# EAGLE board lvc (EAGLE 7.6.0)
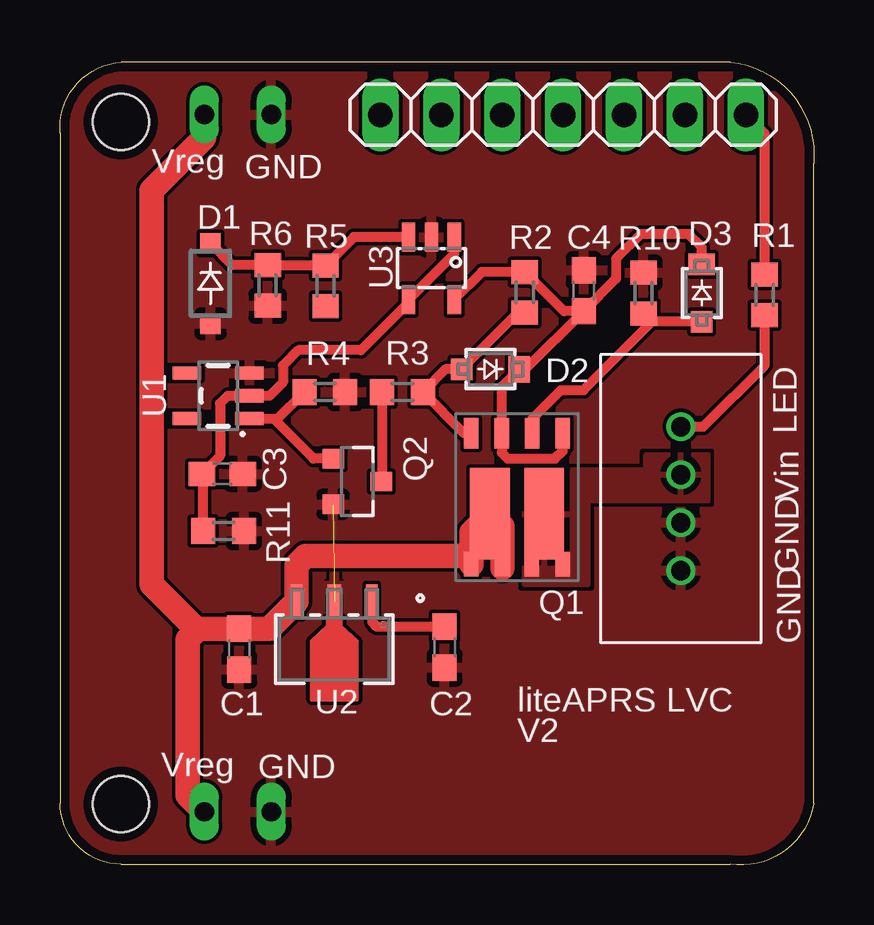
[diagram p0: board, top side]
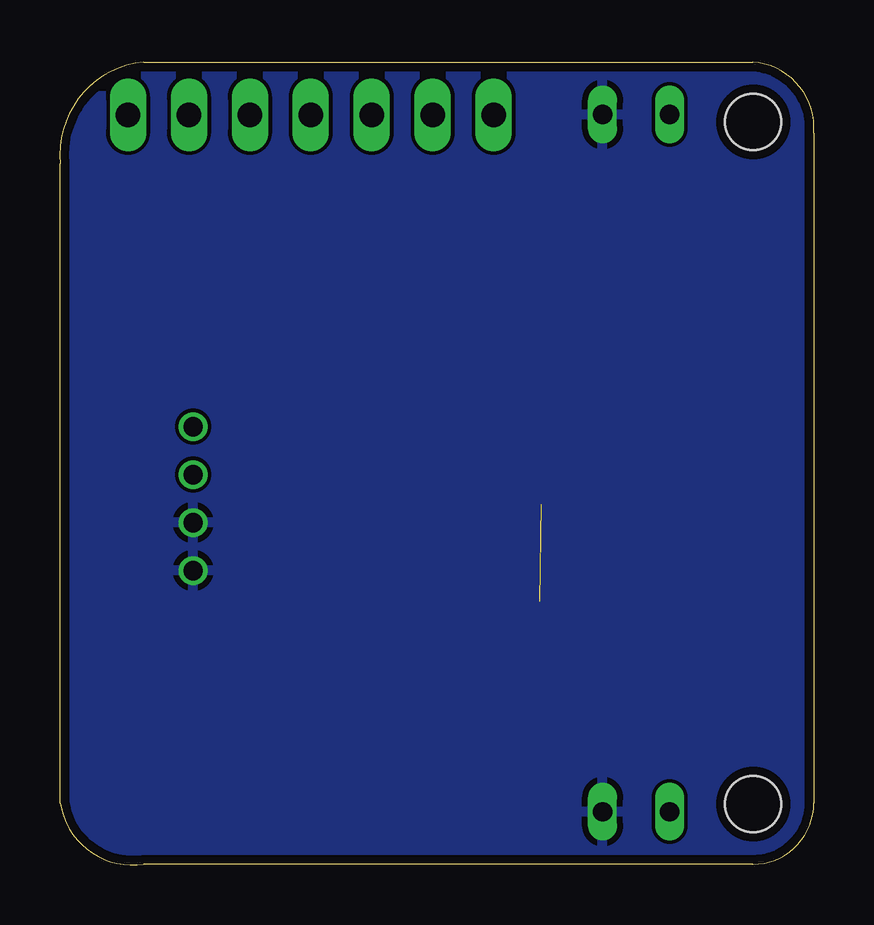
[diagram p1: board, bottom side, seen from below]

Size 31.44 x 33.48 mm. Coordinates in mm from the lower left corner, seen from the top.
Outline: 27.95,33.48 2.55,33.48 arc90 0.01,30.51 0.01,2.57 arc90 2.55,0.03 27.95,0.03 arc90 31.42,2.57 31.42,29.24 arc90 27.95,33.48
Copper layers (1*16): Top 0.035559375mm / dielectric 1.6mm / Bottom 0.035559375mm
Design rules "oshpark-2layer": minimum track width 6mil, minimum drill 10mil, track to track 6mil, track to pad 6mil, pad to pad 6mil, via to via 6mil, smd to smd 6mil, copper to edge 15mil, drill to drill 6mil, minimum pad ring 5mil, minimum via ring 5mil, stop-mask expansion 2.5mil, vias tented up to drill 0mil, thermal gap 10mil
Holes 2.34 mm at 2.53,30.97 2.53,2.54

## Footprints (pad centres in the part's own frame; a part is rotated, then mirrored left to right if it is on the bottom)
C0603 = smd 1.1 x 1: 1 -0.85,0; 2 0.85,0
SOD123 = smd 0.85 x 0.85: A 1.675,0; C -1.675,0
SMINI2-F5-B = smd 0.9 x 0.9: A -1.2,0 | smd 0.9 x 1.1: C 1.2,0
1X07 = drill 1.016 long: 1 -7.62,0; 2 -5.08,0; 3 -2.54,0; 4 0,0; 5 2.54,0; 6 5.08,0; 7 7.62,0
POWERPAK-SO-8-DUAL = smd 0.61 x 1.27: 1 -1.905,-2.725; 2 -0.635,-2.725; 3 0.635,-2.725; 4 1.905,-2.725 | smd 0.61 x 1.02: 5 1.905,2.74; 8 -1.905,2.74 | smd 1.65 x 3.81: 5L 1.13,0.635; 8L -1.13,0.635 | smd 0.61 x 0.71: 6 0.61,2.895; 7 -0.61,2.895
SOT23 = smd 0.8 x 0.9: 1 -0.95,-1; 2 0.95,-1; 3 0,1
R0603 = smd 1 x 1.1: 1 -0.85,0; 2 0.85,0
SOT23-5 = smd 0.55 x 1.2: 1 -0.95,-1.3; 2 0,-1.3; 3 0.95,-1.3; 4 0.95,1.3; 5 -0.95,1.3
SOT-89 = smd 0.483 x 1.397: 1 -1.57,-1.994; 3 1.57,-1.994 | smd 0.559 x 1.397: 2 0,-1.994
SOT23-DBV = smd 0.55 x 1.2: 1 -0.95,-1.3; 2 0,-1.3; 3 0.95,-1.3; 4 0.95,1.3; 5 -0.95,1.3
4_PIN_MICROCLASP = drill 0.8: P$1 -1,0; P$2 -3,0; P$3 1,0; P$4 3,0
LITEAPRS = drill 0.8 long: P$1 -1.397,0; P$2 1.397,0

## Placement (x,y rotation side)
C1  0.33uF  [C0603]  7.47,9 270 top
C2  0.1uF  [C0603]  16.04,9.08 270 top
C3  47pF  [C0603]  6.77,16.31 0 top
C4  0.1uF  [C0603]  21.84,23.94 90 top
D1  BZT52B8V2  [SOD123]  6.28,24.24 270 top
D2  DZ2J120M0L  [SMINI2-F5-B]  17.95,20.67 0 top
D3  DZ2J120M0L  [SMINI2-F5-B]  26.76,23.85 90 top
JP2  [1X07]  20.98,31.28 180 top
Q1  SI7997DP  [POWERPAK-SO-8-DUAL]  19.06,15.27 180 top
Q2  RK7002BMT116  [SOT23]  12.39,15.99 270 top
R1  [R0603]  29.38,23.77 270 top
R2  100k  [R0603]  19.38,23.88 270 top
R3  3k  [R0603]  14.28,19.72 180 top
R4  100k  [R0603]  11.04,19.72 0 top
R5  1M  [R0603]  11.07,24.15 90 top
R6  1M  [R0603]  8.66,24.16 270 top
R10  1M  [R0603]  24.33,23.85 90 top
R11  100k  [R0603]  6.82,13.92 180 top
U1  NCP300LSN33T1G  [SOT23-5]  6.6,19.56 90 top
U2  L78L33ACUTR  [SOT-89]  11.44,9 180 top
U3  TLV170IDBVR  [SOT23-DBV]  15.49,24.88 180 top
U$1  MICROCLASP_4  [4_PIN_MICROCLASP]  25.88,15.27 270 top
U$2  LITEAPRS  [LITEAPRS]  7.41,31.29 0 top
U$3  LITEAPRS  [LITEAPRS]  7.41,2.22 0 top

## Library data of the parts
C1-C4 = rcl; SPICEPREFIX: C
D1 = vishay1
D2 D3 = LR_zener; MANUFACTURER_PART_NUMBER: DZ2J120M0L; VENDOR: Panasonic
JP2 = pinhead
Q1 = AR_transistor
Q2 = LR_transistor
R1-R6 R10 = resistor
R11 = rcl; SPICEPREFIX: R
U1 = onsemi
U2 = LR_vreg; MANUFACTURER_PART_NUMBER: L78L33ACUTR; VENDOR: STMicroelectronics
U3 = LR_op_amps
U$1-U$3 = NR_connectors

## Nets
EN: R5.1
GND: C1.2 C2.2 C3.2 C4.2 D1.A Q2.2 R4.2 R6.2 R10.2 R11.1 U1.3 U2.2 U3.2 U$1.P$3 U$1.P$4 U$2.P$2 U$3.P$2
LED: C2.1 U2.1
LOAD: Q2.1 R4.1 U1.1
MISO_6: JP2.2
N$1: R1.2 U$1.P$2
N$5: D2.A Q1.4 R2.2 R3.1
N$6: D3.A Q1.2 R10.1
N$7: Q2.3 R3.2
N$9: JP2.7
RST: JP2.6
SCK_7: JP2.3
SCL_16: JP2.5
SDA_17: JP2.4
STATUS: JP2.1 R1.1
V+: C4.1 D2.C D3.C Q1.1 Q1.3 R2.1 U3.5
V_DIV: D1.C R5.2 R6.1 U3.3
V_DIV_BUF: C3.1 R11.2 U1.2 U3.1 U3.4
VDD: Q1.7 Q1.8 Q1.8L U$1.P$1
VREG: C1.1 Q1.5 Q1.5L Q1.6 U2.3 U$2.P$1 U$3.P$1

## Tracks (layer width: path | path; a pad name or v marks a point on that pad's centre or on a via)
GND  (1 unrouted)
  pour Top (rank 3, no thermals): 12.15,11.73 12.15,9.96 12.71,9.4 12.79,6.23 10.12,6.3 10.17,9.24 10.83,9.92 10.83,11.73
  pour Top (rank 6): -1.26,34.32 33.03,34.32 33.03,-1.24 -1.26,-1.24
  pour Bottom: -2.53,35.59 34.3,35.59 34.3,-2.51 -2.53,-2.51
LED
  Top 0.406: U2.1 13.03,10.98 13.03,10.12 13.21,9.93 C2.1
LOAD
  Top 0.406: U1.1 8.9,18.61 | 8.9,18.61 9.08,18.61 R4.1 | Q2.1 10.57,16.94 8.9,18.61
N$1
  Top 0.406: U$1.P$2 26.82,18.27 29.38,20.83 R1.2
N$5
  Top 0.406: R2.2 19.1,23.03 D2.A 16.08,20.67 R3.1 16.85,18 Q1.4
N$6
  Top 0.406: D3.A 24.68,22.65 | 24.68,22.65 R10.1 | Q1.2 19.69,18.61 20.88,19.8 21.83,19.8 24.68,22.65
N$7
  Top 0.406: R3.2 13.43,16.03 Q2.3
STATUS
  Top 0.406: R1.1 29.38,30.5 JP2.1
V+
  Top 0.406: Q1.1 20.96,17.26 20.64,16.94 18.66,16.94 18.42,17.18 Q1.3 18.42,19.95 D2.C 19.42,20.67 C4.1 | D3.C 26.76,25.75 26.2,26.31 24.22,26.31 23.18,25.28 23.18,24.44 C4.1 | C4.1 21.01,23.09 R2.1 17.59,24.73 U3.5
V_DIV
  Top 0.406: U3.3 12.25,26.18 R5.2 8.68,25 R6.1 7.18,25.01 D1.C
V_DIV_BUF
  Top 0.406: U3.1 16.44,25.48 U3.4 14.54,23.45 12.55,21.47 9.93,21.47 9.29,20.83 9.29,20.12 8.74,19.56 U1.2 6.99,19.56 6.68,19.24 6.68,17.06 C3.1 5.97,16.26 R11.2
VDD
  pour Top: 19.38,16.46 24.46,16.46 24.46,17.1 27,17.1 27,15.19 21.99,15.19 21.99,11.7 19.38,11.7
VREG
  Top 1.016: 17.15,13.21 17.15,13.86 Q1.5L 18.45,14.12 Q1.6 | 17.15,13.21 Q1.5 | 17.15,13.21 16.84,12.89 10.25,12.89 9.87,12.51 U2.3 8.72,9.85 C1.1 5.78,9.85 5.72,9.8 | 5.72,9.8 5.33,9.4 5.33,2.92 U$3.P$1 | U$2.P$1 6.02,30.33 3.82,28.13 3.82,11.7 5.72,9.8

## Text on the board
tPlace: Vreg | GND | LED | Vin | GND | GND | liteAPRS LVC | V2 | Vreg | GND
Document: 2oz Copper / FR-4 or 408 / 1.0±0.1 Via plate thickness